# EAGLE board Mounting_Plate (EAGLE 9.5.2)
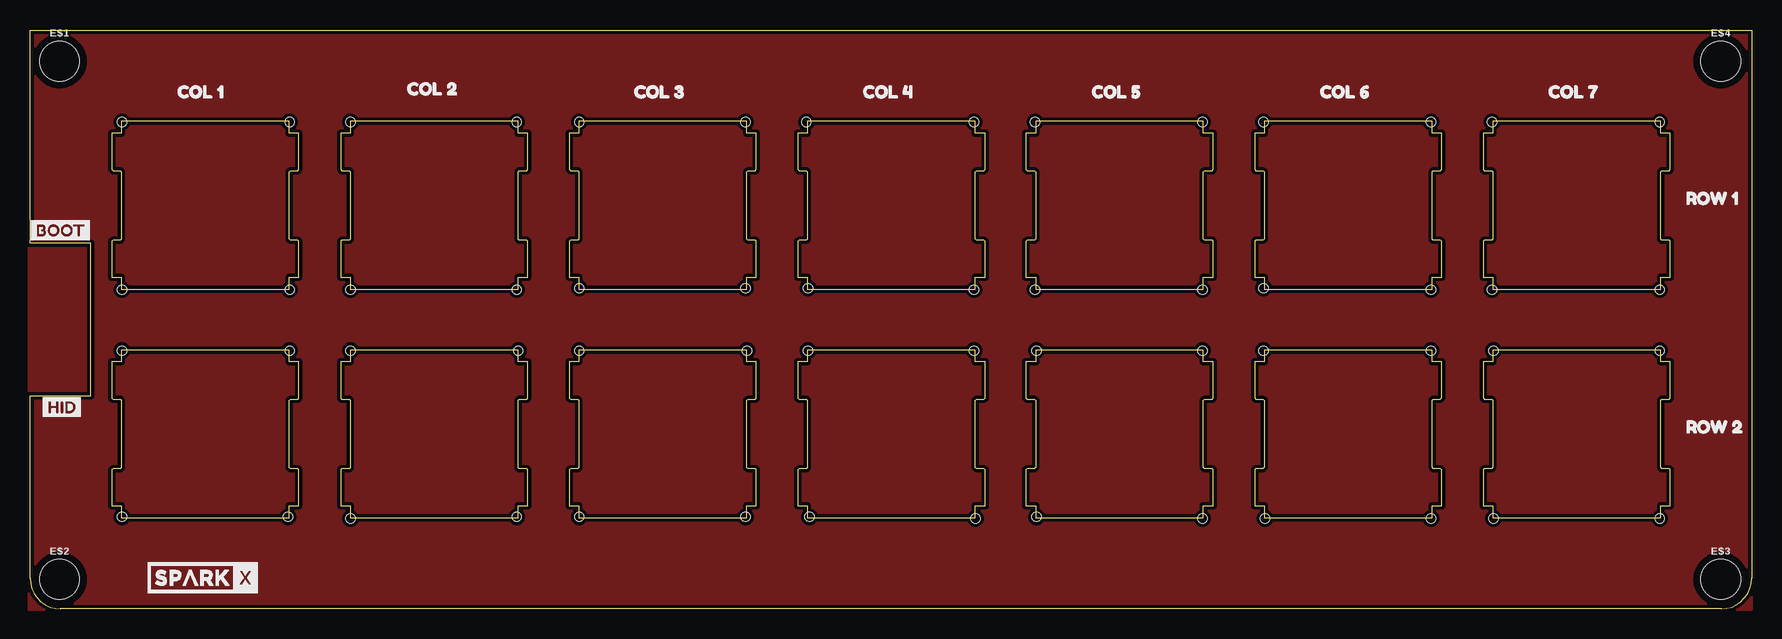
[diagram p0: board, top side]
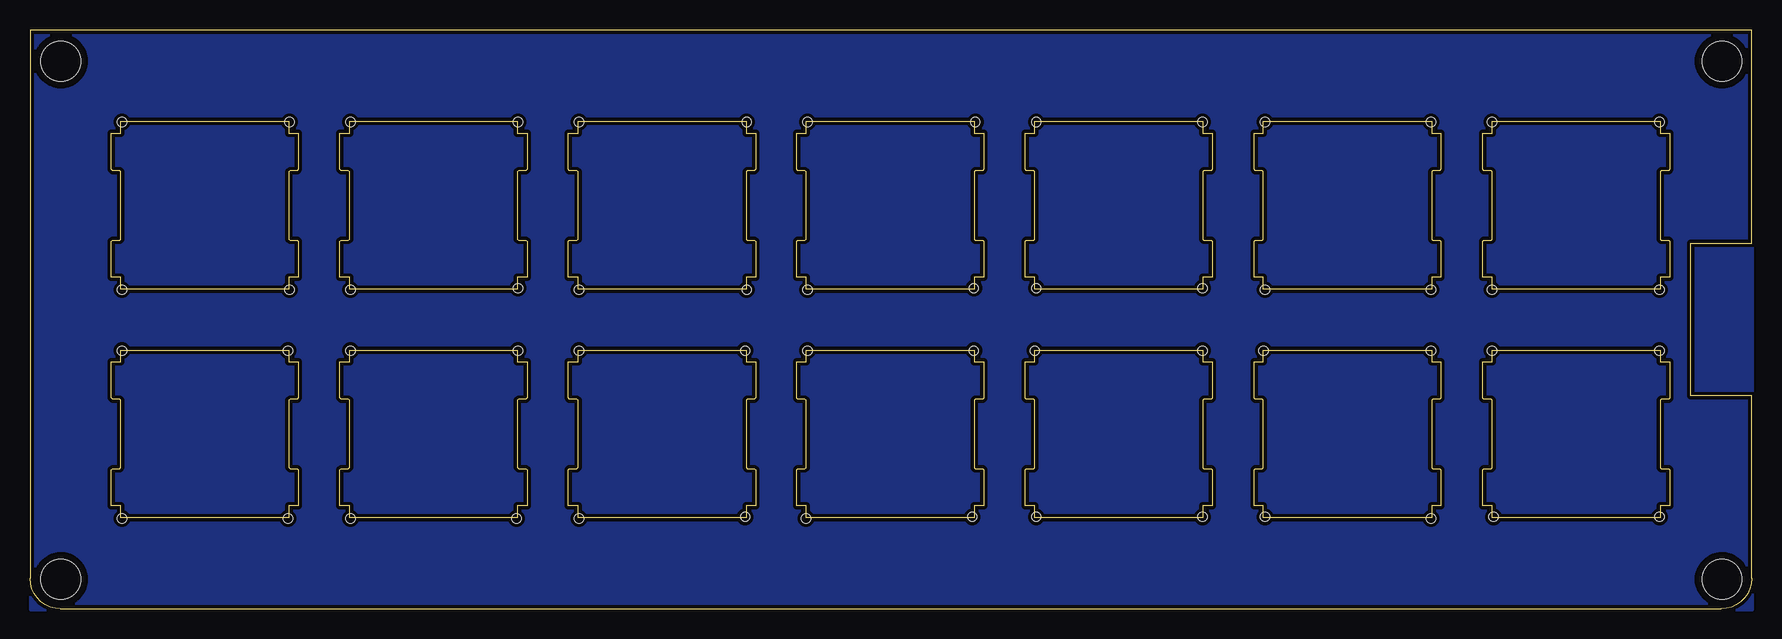
[diagram p1: board, bottom side, seen from below]

Size 143.47 x 48.24 mm. Coordinates in mm from the lower left corner, seen from the top.
Outline: 0,48.24 143.47,48.24 143.47,2.54 143.43,2.1 143.32,1.67 143.13,1.27 142.87,0.91 142.56,0.59 142.2,0.34 141.8,0.15 141.37,0.04 140.93,0 2.54,0 2.1,0.04 1.67,0.15 1.27,0.34 0.91,0.59 0.59,0.91 0.34,1.27 0.15,1.67 0.04,2.1 0,2.54 0,17.78 5.08,17.78 5.08,30.46 0,30.46 0,48.24
Outline: 21.61,26.63 21.61,27.62 22.42,27.62 22.42,30.63 22.31,30.71 21.72,30.71 21.61,30.82 21.61,36.43 21.72,36.51 22.31,36.51 22.42,36.62 22.42,39.62 21.61,39.62 21.61,40.62 7.62,40.62 7.62,39.62 6.82,39.62 6.82,36.62 6.92,36.51 7.51,36.51 7.62,36.43 7.62,30.82 7.51,30.71 6.92,30.71 6.82,30.63 6.82,27.62 7.62,27.62 7.62,26.63 21.61,26.63
Outline: 40.68,26.63 40.68,27.62 41.47,27.62 41.47,30.63 41.38,30.71 40.77,30.71 40.68,30.82 40.68,36.43 40.77,36.51 41.38,36.51 41.47,36.62 41.47,39.62 40.68,39.62 40.68,40.62 26.67,40.62 26.67,39.62 25.89,39.62 25.89,36.62 25.97,36.51 26.59,36.51 26.67,36.43 26.67,30.82 26.59,30.71 25.97,30.71 25.89,30.63 25.89,27.62 26.67,27.62 26.67,26.63 40.68,26.63
Outline: 59.73,26.63 59.73,27.62 60.54,27.62 60.54,30.63 60.43,30.71 59.84,30.71 59.73,30.82 59.73,36.43 59.84,36.51 60.43,36.51 60.54,36.62 60.54,39.62 59.73,39.62 59.73,40.62 45.74,40.62 45.74,39.62 44.94,39.62 44.94,36.62 45.04,36.51 45.64,36.51 45.74,36.43 45.74,30.82 45.64,30.71 45.04,30.71 44.94,30.63 44.94,27.62 45.74,27.62 45.74,26.63 59.73,26.63
Outline: 78.78,26.63 78.78,27.62 79.59,27.62 79.59,30.63 79.48,30.71 78.89,30.71 78.78,30.82 78.78,36.43 78.89,36.51 79.48,36.51 79.59,36.62 79.59,39.62 78.78,39.62 78.78,40.62 64.79,40.62 64.79,39.62 63.99,39.62 63.99,36.62 64.09,36.51 64.69,36.51 64.79,36.43 64.79,30.82 64.69,30.71 64.09,30.71 63.99,30.63 63.99,27.62 64.79,27.62 64.79,26.63 78.78,26.63
Outline: 21.61,7.58 21.61,8.57 22.42,8.57 22.42,11.58 22.31,11.66 21.72,11.66 21.61,11.77 21.61,17.38 21.72,17.46 22.31,17.46 22.42,17.57 22.42,20.57 21.61,20.57 21.61,21.57 7.62,21.57 7.62,20.57 6.82,20.57 6.82,17.57 6.92,17.46 7.51,17.46 7.62,17.38 7.62,11.77 7.51,11.66 6.92,11.66 6.82,11.58 6.82,8.57 7.62,8.57 7.62,7.58 21.61,7.58
Outline: 40.68,7.58 40.68,8.57 41.47,8.57 41.47,11.58 41.38,11.66 40.77,11.66 40.68,11.77 40.68,17.38 40.77,17.46 41.38,17.46 41.47,17.57 41.47,20.57 40.68,20.57 40.68,21.57 26.67,21.57 26.67,20.57 25.89,20.57 25.89,17.57 25.97,17.46 26.59,17.46 26.67,17.38 26.67,11.77 26.59,11.66 25.97,11.66 25.89,11.58 25.89,8.57 26.67,8.57 26.67,7.58 40.68,7.58
Outline: 59.73,7.58 59.73,8.57 60.54,8.57 60.54,11.58 60.43,11.66 59.84,11.66 59.73,11.77 59.73,17.38 59.84,17.46 60.43,17.46 60.54,17.57 60.54,20.57 59.73,20.57 59.73,21.57 45.74,21.57 45.74,20.57 44.94,20.57 44.94,17.57 45.04,17.46 45.64,17.46 45.74,17.38 45.74,11.77 45.64,11.66 45.04,11.66 44.94,11.58 44.94,8.57 45.74,8.57 45.74,7.58 59.73,7.58
Outline: 78.78,7.58 78.78,8.57 79.59,8.57 79.59,11.58 79.48,11.66 78.89,11.66 78.78,11.77 78.78,17.38 78.89,17.46 79.48,17.46 79.59,17.57 79.59,20.57 78.78,20.57 78.78,21.57 64.79,21.57 64.79,20.57 63.99,20.57 63.99,17.57 64.09,17.46 64.69,17.46 64.79,17.38 64.79,11.77 64.69,11.66 64.09,11.66 63.99,11.58 63.99,8.57 64.79,8.57 64.79,7.58 78.78,7.58
Outline: 97.79,26.63 97.79,27.62 98.59,27.62 98.59,30.63 98.51,30.71 97.9,30.71 97.79,30.82 97.79,36.43 97.9,36.51 98.51,36.51 98.59,36.62 98.59,39.62 97.79,39.62 97.79,40.62 83.8,40.62 83.8,39.62 82.99,39.62 82.99,36.62 83.1,36.51 83.69,36.51 83.8,36.43 83.8,30.82 83.69,30.71 83.1,30.71 82.99,30.63 82.99,27.62 83.8,27.62 83.8,26.63 97.79,26.63
Outline: 97.79,7.58 97.79,8.59 98.59,8.59 98.59,11.58 98.51,11.68 97.9,11.68 97.79,11.79 97.79,17.38 97.9,17.48 98.51,17.48 98.59,17.59 98.59,20.57 97.79,20.57 97.79,21.57 83.8,21.57 83.8,20.57 82.99,20.57 82.99,17.59 83.1,17.48 83.69,17.48 83.8,17.38 83.8,11.79 83.69,11.68 83.1,11.68 82.99,11.58 82.99,8.59 83.8,8.59 83.8,7.58 97.79,7.58
Outline: 116.84,26.63 116.84,27.62 117.64,27.62 117.64,30.63 117.54,30.71 116.95,30.71 116.84,30.82 116.84,36.43 116.95,36.51 117.54,36.51 117.64,36.62 117.64,39.62 116.84,39.62 116.84,40.62 102.85,40.62 102.85,39.62 102.04,39.62 102.04,36.62 102.15,36.51 102.74,36.51 102.85,36.43 102.85,30.82 102.74,30.71 102.15,30.71 102.04,30.63 102.04,27.62 102.85,27.62 102.85,26.63 116.84,26.63
Outline: 116.84,7.58 116.84,8.59 117.64,8.59 117.64,11.58 117.54,11.68 116.95,11.68 116.84,11.79 116.84,17.38 116.95,17.48 117.54,17.48 117.64,17.59 117.64,20.57 116.84,20.57 116.84,21.57 102.85,21.57 102.85,20.57 102.04,20.57 102.04,17.59 102.15,17.48 102.74,17.48 102.85,17.38 102.85,11.79 102.74,11.68 102.15,11.68 102.04,11.58 102.04,8.59 102.85,8.59 102.85,7.58 116.84,7.58
Outline: 135.89,26.63 135.89,27.62 136.69,27.62 136.69,30.63 136.59,30.71 136,30.71 135.89,30.82 135.89,36.43 136,36.51 136.59,36.51 136.69,36.62 136.69,39.62 135.89,39.62 135.89,40.62 121.9,40.62 121.9,39.62 121.09,39.62 121.09,36.62 121.2,36.51 121.79,36.51 121.9,36.43 121.9,30.82 121.79,30.71 121.2,30.71 121.09,30.63 121.09,27.62 121.9,27.62 121.9,26.63 135.89,26.63
Outline: 135.89,7.58 135.89,8.59 136.69,8.59 136.69,11.58 136.59,11.68 136,11.68 135.89,11.79 135.89,17.38 136,17.48 136.59,17.48 136.69,17.59 136.69,20.57 135.89,20.57 135.89,21.57 121.9,21.57 121.9,20.57 121.09,20.57 121.09,17.59 121.2,17.48 121.79,17.48 121.9,17.38 121.9,11.79 121.79,11.68 121.2,11.68 121.09,11.58 121.09,8.59 121.9,8.59 121.9,7.58 135.89,7.58
Copper layers (1*16): Top 0.035mm / dielectric 1.5mm / Bottom 0.035mm
Design rules "SparkFun-2-layer-PCBWay-LIMIT": minimum track width 6mil, minimum drill 0.3mm, track to track 6mil, track to pad 6mil, pad to pad 6mil, via to via 6mil, smd to smd 6mil, copper to edge 6mil, drill to drill 6mil, minimum pad ring 6mil, minimum via ring 6mil, stop-mask expansion 4mil, vias tented up to drill 25mil, thermal gap 10mil
Holes 0.76 mm at 7.67,40.56 21.64,40.56 21.64,26.59 7.67,26.59 7.67,21.51 7.67,7.67 21.51,7.67 21.64,21.51 26.72,21.51 26.72,7.54 40.56,7.67 40.69,21.51 26.72,40.56 40.56,40.56 40.56,26.59 26.72,26.59 45.77,26.72 45.77,40.56 59.61,40.56 59.61,26.72 64.82,26.72 64.69,40.56 78.66,40.56 78.66,26.59 78.66,21.51 64.82,21.51 64.95,7.67 78.79,7.54 59.61,7.67 45.77,7.67 45.77,21.51 59.74,21.51 83.74,40.56 97.71,40.56 97.71,26.59 83.74,26.59 83.87,21.51 97.71,21.51 97.71,7.54 83.87,7.67 102.79,21.51 116.76,21.51 116.76,7.54 102.92,7.54 102.79,26.72 116.76,26.59 116.76,40.56 102.79,40.56 121.84,40.56 135.81,40.56 135.81,26.59 121.84,26.59 121.97,21.51 121.97,7.54 135.81,7.54 135.81,21.51

## Footprints (pad centres in the part's own frame; a part is rotated, then mirrored left to right if it is on the bottom)
STAND-OFF = hole 3.302: 0,0

## Placement (x,y rotation side)
E$1  [STAND-OFF]  2.46,45.64 0 top
E$2  [STAND-OFF]  2.46,2.46 0 top
E$3  [STAND-OFF]  140.89,2.46 0 top
E$4  [STAND-OFF]  140.89,45.64 0 top
E$5  [BOOT1]  -0.46,31.55 0 top
E$6  [HID0]  0.56,16.81 0 top
E$7  [SPARKX-MEDIUM]  14.4,2.59 0 top
E$8  [ROW_10]  137.08,34.21 0 top
E$9  [ROW_21]  137.08,15.16 0 top
E$10  [COL_12]  11.35,43.1 0 top
E$11  [COL_23]  30.53,43.36 0 top
E$12  [COL_34]  49.45,43.1 0 top
E$13  [COL_45]  68.5,43.1 0 top
E$14  [COL_56]  87.55,43.1 0 top
E$15  [COL_67]  106.6,43.1 0 top
E$16  [COL_78]  125.65,43.1 0 top

## Library data of the parts
E$1-E$4 = SparkFun-Hardware
E$5 E$6 = buzzard_labels (4)
E$7 = SparkX
E$8-E$16 = buzzard_labels (5)

## Tracks (layer width: path | path; a pad name or v marks a point on that pad's centre or on a via)
GND
  pour Top (isolate 0.305): -0.08,48.18 143.43,48.18 143.43,-0.08 -0.08,-0.08
  pour Bottom (isolate 0.305): -0.08,48.18 143.43,48.18 143.43,-0.08 -0.08,-0.08